# EAGLE board board_firstTry (EAGLE 6.6.0)
CIRCULAR-LAYOUT-SETTINGS: 1.968500 1.968500 1.614200 0.000000 0 0

No outline drawn. Coordinates in mm, seen from the top.
Copper layers (1*16): Top 0.035mm / dielectric 1.5mm / Bottom 0.035mm
Design rules "default": minimum track width 10mil, minimum drill 24mil, track to track 8mil, track to pad 8mil, pad to pad 8mil, via to via 8mil, smd to smd 8mil, copper to edge 40mil, drill to drill 8mil, minimum pad ring 10mil, minimum via ring 8mil, stop-mask expansion 4mil, vias tented up to drill 0mil, thermal gap 10mil
Holes 3.2 mm at 24,50 50,76 76,50.16
bKeepout: area 61.6,55.2 to 68.6,70.5; 9 lines

## Footprints (pad centres in the part's own frame; a part is rotated, then mirrored left to right if it is on the bottom)
SO14 = smd 0.6 x 2.2: 1 -3.81,-2.6; 2 -2.54,-2.6; 3 -1.27,-2.6; 4 0,-2.6; 5 1.27,-2.6; 6 2.54,-2.6; 7 3.81,-2.6; 8 3.81,2.6; 9 2.54,2.6; 10 1.27,2.6; 11 0,2.6; 12 -1.27,2.6; 13 -2.54,2.6; 14 -3.81,2.6
WS2812B = smd 2 x 1.1: DIN 2,1.7; DOUT -2,-1.7; VDD -2,1.7; VSS 2,-1.7
SOT23-5 = smd 0.55 x 1.2: 1 -0.95,-1.3; 2 0,-1.3; 3 0.95,-1.3; 4 0.95,1.3; 5 -0.95,1.3
TSOT23-6 = smd 0.62 x 1.22: 1 -0.95,-1.3; 2 0,-1.3; 3 0.95,-1.3; 4 0.95,1.3; 5 0,1.3; 6 -0.95,1.3
RASM7X2 = smd 4 x 6.4: P$1 -6.2,-3.6 | smd 3.7 x 6.4: P$2 6.35,-3.6 | smd 2.8 x 4.06: P$3 0.8,5.85
LQFP100 = smd 1.5 x 0.35: 1 -8,6; 2 -8,5.5; 3 -8,5; 4 -8,4.5; 5 -8,4; 6 -8,3.5; 7 -8,3; 8 -8,2.5; 9 -8,2; 10 -8,1.5; 11 -8,1; 12 -8,0.5; 13 -8,0; 14 -8,-0.5; 15 -8,-1; 16 -8,-1.5; 17 -8,-2; 18 -8,-2.5; 19 -8,-3; 20 -8,-3.5; 21 -8,-4; 22 -8,-4.5; 23 -8,-5; 24 -8,-5.5; 25 -8,-6; 51 8,-6; 52 8,-5.5; 53 8,-5; 54 8,-4.5; 55 8,-4; 56 8,-3.5; 57 8,-3; 58 8,-2.5; 59 8,-2; 60 8,-1.5; 61 8,-1; 62 8,-0.5; 63 8,0; 64 8,0.5; 65 8,1; 66 8,1.5; 67 8,2; 68 8,2.5; 69 8,3; 70 8,3.5; 71 8,4; 72 8,4.5; 73 8,5; 74 8,5.5; 75 8,6 | smd 0.35 x 1.5: 26 -6,-8; 27 -5.5,-8; 28 -5,-8; 29 -4.5,-8; 30 -4,-8; 31 -3.5,-8; 32 -3,-8; 33 -2.5,-8; 34 -2,-8; 35 -1.5,-8; 36 -1,-8; 37 -0.5,-8; 38 0,-8; 39 0.5,-8; 40 1,-8; 41 1.5,-8; 42 2,-8; 43 2.5,-8; 44 3,-8; 45 3.5,-8; 46 4,-8; 47 4.5,-8; 48 5,-8; 49 5.5,-8; 50 6,-8; 76 6,8; 77 5.5,8; 78 5,8; 79 4.5,8; 80 4,8; 81 3.5,8; 82 3,8; 83 2.5,8; 84 2,8; 85 1.5,8; 86 1,8; 87 0.5,8; 88 0,8; 89 -0.5,8; 90 -1,8; 91 -1.5,8; 92 -2,8; 93 -2.5,8; 94 -3,8; 95 -3.5,8; 96 -4,8; 97 -4.5,8; 98 -5,8; 99 -5.5,8; 100 -6,8
USB-B-SMT = smd 6.04 x 3.4: 5 0.58,6.8; 6 0.58,-6.8 | smd 3 x 0.7: D+ 7,1.875; D- 7,0.625; GND 7,-0.625; VUSB 7,-1.875 | hole 1.4: 0,2.25; 0,-2.25

## Placement (x,y rotation side)
74HCT  [SO14]  40.64,79.38 0 bottom
E$1  [WS2812B]  69.11,92.93 336 top
E$2  [WS2812B]  77.62,88.02 324 top
E$3  [WS2812B]  84.92,81.44 312 top
E$4  [WS2812B]  90.69,73.49 300 top
E$5  [WS2812B]  94.69,64.52 288 top
E$6  [WS2812B]  96.73,54.91 276 top
E$7  [WS2812B]  96.73,45.09 264 top
E$8  [WS2812B]  94.69,35.48 252 top
E$9  [WS2812B]  90.69,26.5 240 top
E$10  [WS2812B]  84.92,18.56 228 top
E$11  [WS2812B]  77.62,11.98 216 top
E$12  [WS2812B]  69.11,7.07 204 top
E$13  [WS2812B]  59.77,4.04 192 top
E$14  [WS2812B]  50,3.01 180 top
E$15  [WS2812B]  40.23,4.04 168 top
E$16  [WS2812B]  30.89,7.07 156 top
E$17  [WS2812B]  22.38,11.98 144 top
E$18  [WS2812B]  15.08,18.56 132 top
E$19  [WS2812B]  9.31,26.5 120 top
E$20  [WS2812B]  5.31,35.48 108 top
E$21  [WS2812B]  3.27,45.09 96 top
E$22  [WS2812B]  3.27,54.91 84 top
E$23  [WS2812B]  5.31,64.52 72 top
E$24  [WS2812B]  9.31,73.49 60 top
E$25  [WS2812B]  15.08,81.44 48 top
E$26  [WS2812B]  22.38,88.02 36 top
E$27  [WS2812B]  30.89,92.93 24 top
E$28  [WS2812B]  40.23,95.96 12 top
E$29  [WS2812B]  50,96.99 0 top
E$30  [WS2812B]  59.77,95.96 348 top
E$31  [WS2812B]  77.6,80.55 318 top
E$32  [WS2812B]  83.34,74.18 306 top
E$33  [WS2812B]  87.62,66.75 294 top
E$34  [WS2812B]  90.27,58.6 282 top
E$35  [WS2812B]  91.17,50.08 270 top
E$36  [WS2812B]  90.27,41.55 258 top
E$37  [WS2812B]  87.62,33.4 246 top
E$38  [WS2812B]  83.34,25.98 234 top
E$39  [WS2812B]  77.6,19.61 222 top
E$40  [WS2812B]  70.67,14.57 210 top
E$41  [WS2812B]  62.84,11.08 198 top
E$42  [WS2812B]  54.45,9.3 186 top
E$43  [WS2812B]  45.88,9.3 174 top
E$44  [WS2812B]  37.5,11.08 162 top
E$45  [WS2812B]  29.67,14.57 150 top
E$46  [WS2812B]  22.73,19.61 138 top
E$47  [WS2812B]  17,25.98 126 top
E$48  [WS2812B]  12.71,33.4 114 top
E$49  [WS2812B]  10.06,41.55 102 top
E$50  [WS2812B]  9.17,50.08 90 top
E$51  [WS2812B]  10.06,58.6 78 top
E$52  [WS2812B]  12.71,66.75 66 top
E$53  [WS2812B]  17,74.18 54 top
E$54  [WS2812B]  22.73,80.55 42 top
E$55  [WS2812B]  29.67,85.59 30 top
E$56  [WS2812B]  37.5,89.07 18 top
E$57  [WS2812B]  45.88,90.85 6 top
E$58  [WS2812B]  54.45,90.85 354 top
E$59  [WS2812B]  62.84,89.07 342 top
E$60  [WS2812B]  70.67,85.59 330 top
LDO  [SOT23-5]  50.8,51.44 270 bottom
LTC4412  [TSOT23-6]  61.59,41.91 0 bottom
PWR  [RASM7X2]  66.67,29.84 0 bottom
STM32F7  [LQFP100]  35.56,61.59 0 bottom
USB-B  [USB-B-SMT]  33.02,28.57 90 bottom

## Library data of the parts
74HCT LDO = analog-devices
E$1-E$60 = WS2812B
LTC4412 = linear-technology
PWR = RASM7X2
STM32F7 = STM32F407Vx_LQFP100
USB-B = usb

## Text on the board
tKeepout: Mosfets | USB-Datenleitung